# EAGLE board mightIO_tile (EAGLE 6.5.0)
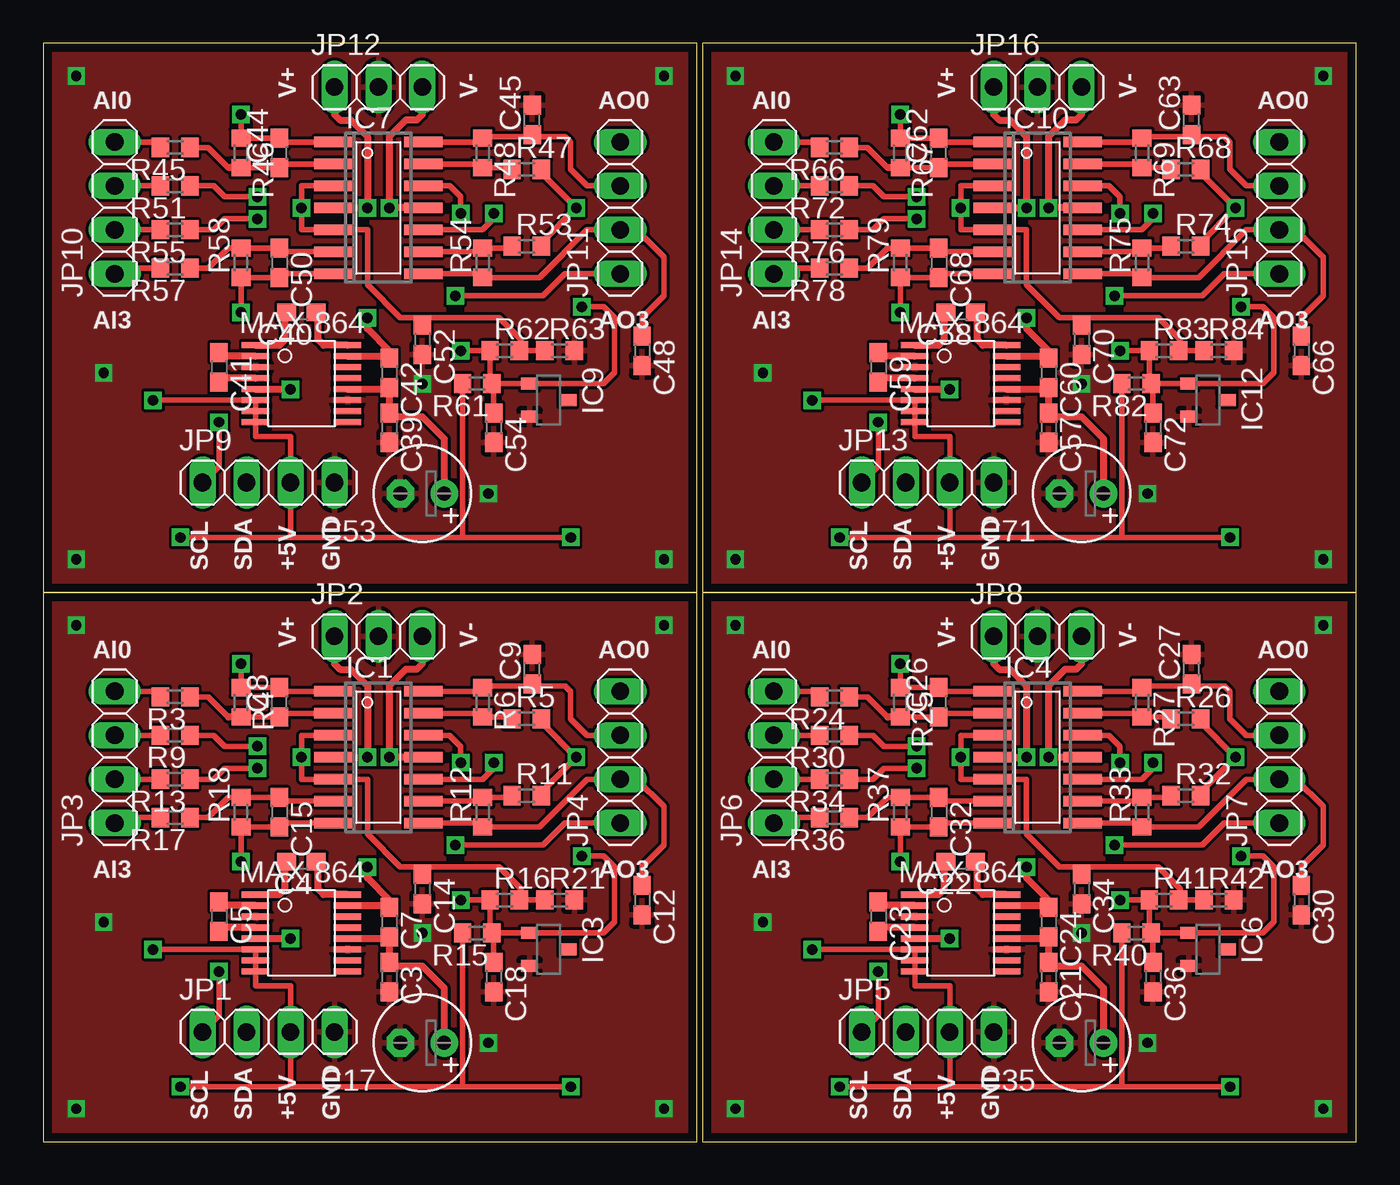
[diagram p0: board, top side]
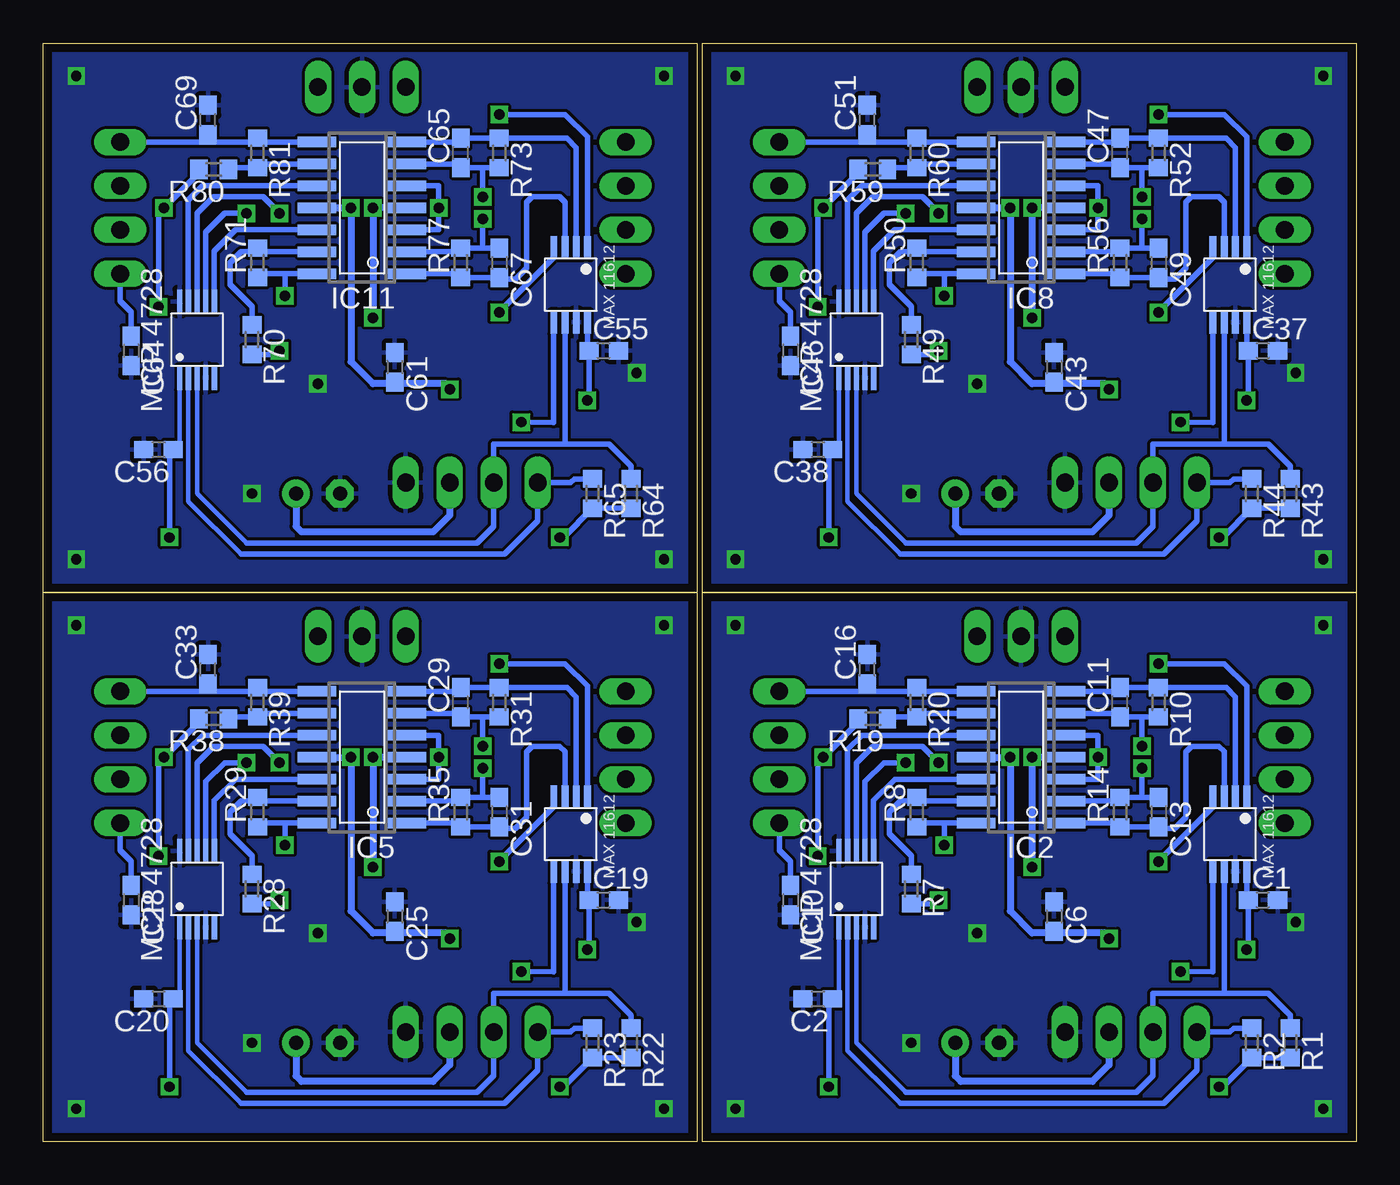
[diagram p1: board, bottom side, seen from below]

Size 75.88 x 63.49 mm. Coordinates in mm from the lower left corner, seen from the top.
Outline: 37.77,0 37.77,31.74 0,31.74 0,0 37.78,0
Outline: 75.87,0 75.87,31.74 38.1,31.74 38.1,0 75.88,0
Outline: 37.77,31.75 37.77,63.49 0,63.49 0,31.75 37.78,31.75
Outline: 75.87,31.75 75.87,63.49 38.1,63.49 38.1,31.75 75.88,31.75
Copper layers (1*16): Top 0.035mm / dielectric 1.5mm / Bottom 0.035mm
Design rules "default *": minimum track width 10mil, minimum drill 23mil, track to track 7mil, track to pad 7mil, pad to pad 7mil, via to via 8mil, smd to smd 0mil, copper to edge 20mil, drill to drill 8mil, minimum pad ring 10mil, minimum via ring 8mil, stop-mask expansion 4mil, vias tented up to drill 0mil, thermal gap 10mil
Net classes: 0 default: width 0.254 mm; 1 pwr: width 0.254 mm

## Footprints (pad centres in the part's own frame; a part is rotated, then mirrored left to right if it is on the bottom)
C0603 = smd 1.1 x 1: 1 -0.85,0; 2 0.85,0
E2,5-6 = drill 0.813 pad 1.6: + -1.27,0 | drill 0.813 pad 1.6 octagon: - 1.27,0
SO14 = smd 0.6 x 2.2: 1 -3.81,-2.6; 2 -2.54,-2.6; 3 -1.27,-2.6; 4 0,-2.6; 5 1.27,-2.6; 6 2.54,-2.6; 7 3.81,-2.6; 8 3.81,2.6; 9 2.54,2.6; 10 1.27,2.6; 11 0,2.6; 12 -1.27,2.6; 13 -2.54,2.6; 14 -3.81,2.6
DBZ_R-PDSO-G3 = smd 0.7 x 1: 1 -0.95,-1.1; 2 0.95,-1.1; 3 0,1.1
1X04 = drill 1.016 long: 1 -3.81,0; 2 -1.27,0; 3 1.27,0; 4 3.81,0
1X03 = drill 1.016 long: 1 -2.54,0; 2 0,0; 3 2.54,0
R0603 = smd 1 x 1.1: 1 -0.85,0; 2 0.85,0
MAX11612 = smd 1.35 x 0.4: P$1 -2.15,0.975; P$2 -2.15,0.325; P$3 -2.15,-0.325; P$4 -2.15,-0.975; P$5 2.15,-0.975; P$6 2.15,-0.325; P$7 2.15,0.325; P$8 2.15,0.975
MAX864 = smd 1.6 x 0.36: P$1 -2.655,2.223; P$2 -2.655,1.587; P$3 -2.655,0.953; P$4 -2.655,0.318; P$5 -2.655,-0.318; P$6 -2.655,-0.953; P$7 -2.655,-1.587; P$8 -2.655,-2.223; P$9 2.655,-2.223; P$10 2.655,-1.587; P$11 2.655,-0.953; P$12 2.655,-0.318; P$13 2.655,0.318; P$14 2.655,0.953; P$15 2.655,1.587; P$16 2.655,2.223
MCP4728 = smd 1.4 x 0.3: P$1 -2.2,1; P$2 -2.2,0.5; P$3 -2.2,0; P$4 -2.2,-0.5; P$5 -2.2,-1; P$6 2.2,-1; P$7 2.2,-0.5; P$8 2.2,0; P$9 2.2,0.5; P$10 2.2,1

## Placement (x,y rotation side)
C1  0.1uF  [C0603]  5.4,13.97 0 bottom
C2  0.1uF  [C0603]  31.11,8.26 180 bottom
C3  0.1uF  [C0603]  20,9.53 270 top
C4  2.2uF  [C0603]  14.92,16.19 180 top
C5  2.2uF  [C0603]  10.16,13.02 270 top
C6  2.2uF  [C0603]  17.46,13.02 270 bottom
C7  2.2uF  [C0603]  20,12.7 270 top
C8  220pF  [C0603]  13.65,25.4 90 top
C9  47pF  [C0603]  28.26,27.3 90 top
C10  47pF  [C0603]  32.7,13.97 270 bottom
C11  220pF  [C0603]  13.65,25.4 90 bottom
C12  47pF  [C0603]  34.61,13.97 270 top
C13  220pF  [C0603]  11.43,19.05 270 bottom
C14  0.1uF  [C0603]  21.91,14.61 270 top
C15  220pF  [C0603]  13.65,19.05 270 top
C16  47pF  [C0603]  28.26,27.3 90 bottom
C17  10uF  [E2,5-6]  21.91,5.71 180 top
C18  0.1uF  [C0603]  26.04,9.53 270 top
C19  0.1uF  [C0603]  43.5,13.97 0 bottom
C20  0.1uF  [C0603]  69.22,8.26 180 bottom
C21  0.1uF  [C0603]  58.1,9.53 270 top
C22  2.2uF  [C0603]  53.02,16.19 180 top
C23  2.2uF  [C0603]  48.26,13.02 270 top
C24  2.2uF  [C0603]  58.1,12.7 270 top
C25  2.2uF  [C0603]  55.56,13.02 270 bottom
C26  220pF  [C0603]  51.75,25.4 90 top
C27  47pF  [C0603]  66.36,27.3 90 top
C28  47pF  [C0603]  70.8,13.97 270 bottom
C29  220pF  [C0603]  51.75,25.4 90 bottom
C30  47pF  [C0603]  72.71,13.97 270 top
C31  220pF  [C0603]  49.53,19.05 270 bottom
C32  220pF  [C0603]  51.75,19.05 270 top
C33  47pF  [C0603]  66.36,27.3 90 bottom
C34  0.1uF  [C0603]  60.01,14.61 270 top
C35  10uF  [E2,5-6]  60.01,5.71 180 top
C36  0.1uF  [C0603]  64.14,9.53 270 top
C37  0.1uF  [C0603]  5.4,45.72 0 bottom
C38  0.1uF  [C0603]  31.11,40.01 180 bottom
C39  0.1uF  [C0603]  20,41.27 270 top
C40  2.2uF  [C0603]  14.92,47.94 180 top
C41  2.2uF  [C0603]  10.16,44.77 270 top
C42  2.2uF  [C0603]  20,44.45 270 top
C43  2.2uF  [C0603]  17.46,44.77 270 bottom
C44  220pF  [C0603]  13.65,57.15 90 top
C45  47pF  [C0603]  28.26,59.05 90 top
C46  47pF  [C0603]  32.7,45.72 270 bottom
C47  220pF  [C0603]  13.65,57.15 90 bottom
C48  47pF  [C0603]  34.61,45.72 270 top
C49  220pF  [C0603]  11.43,50.8 270 bottom
C50  220pF  [C0603]  13.65,50.8 270 top
C51  47pF  [C0603]  28.26,59.05 90 bottom
C52  0.1uF  [C0603]  21.91,46.35 270 top
C53  10uF  [E2,5-6]  21.91,37.47 180 top
C54  0.1uF  [C0603]  26.04,41.27 270 top
C55  0.1uF  [C0603]  43.5,45.72 0 bottom
C56  0.1uF  [C0603]  69.22,40.01 180 bottom
C57  0.1uF  [C0603]  58.1,41.27 270 top
C58  2.2uF  [C0603]  53.02,47.94 180 top
C59  2.2uF  [C0603]  48.26,44.77 270 top
C60  2.2uF  [C0603]  58.1,44.45 270 top
C61  2.2uF  [C0603]  55.56,44.77 270 bottom
C62  220pF  [C0603]  51.75,57.15 90 top
C63  47pF  [C0603]  66.36,59.05 90 top
C64  47pF  [C0603]  70.8,45.72 270 bottom
C65  220pF  [C0603]  51.75,57.15 90 bottom
C66  47pF  [C0603]  72.71,45.72 270 top
C67  220pF  [C0603]  49.53,50.8 270 bottom
C68  220pF  [C0603]  51.75,50.8 270 top
C69  47pF  [C0603]  66.36,59.05 90 bottom
C70  0.1uF  [C0603]  60.01,46.35 270 top
C71  10uF  [E2,5-6]  60.01,37.47 180 top
C72  0.1uF  [C0603]  64.14,41.27 270 top
IC1  TL064D  [SO14]  19.37,22.23 270 top
IC2  TL064D  [SO14]  19.37,22.23 90 bottom
IC3  LM4041A12DBZ  [DBZ_R-PDSO-G3]  29.21,11.11 270 top
IC4  TL064D  [SO14]  57.47,22.23 270 top
IC5  TL064D  [SO14]  57.47,22.23 90 bottom
IC6  LM4041A12DBZ  [DBZ_R-PDSO-G3]  67.31,11.11 270 top
IC7  TL064D  [SO14]  19.37,53.98 270 top
IC8  TL064D  [SO14]  19.37,53.98 90 bottom
IC9  LM4041A12DBZ  [DBZ_R-PDSO-G3]  29.21,42.86 270 top
IC10  TL064D  [SO14]  57.47,53.98 270 top
IC11  TL064D  [SO14]  57.47,53.98 90 bottom
IC12  LM4041A12DBZ  [DBZ_R-PDSO-G3]  67.31,42.86 270 top
JP1  [1X04]  13.02,6.35 0 top
JP2  [1X03]  19.37,29.21 0 top
JP3  [1X04]  4.13,22.23 90 top
JP4  [1X04]  33.34,22.23 90 top
JP5  [1X04]  51.12,6.35 0 top
JP6  [1X04]  42.23,22.23 90 top
JP7  [1X04]  71.44,22.23 90 top
JP8  [1X03]  57.47,29.21 0 top
JP9  [1X04]  13.02,38.1 0 top
JP10  [1X04]  4.13,53.98 90 top
JP11  [1X04]  33.34,53.98 90 top
JP12  [1X03]  19.37,60.96 0 top
JP13  [1X04]  51.12,38.1 0 top
JP14  [1X04]  42.23,53.98 90 top
JP15  [1X04]  71.44,53.98 90 top
JP16  [1X03]  57.47,60.96 0 top
R1  3.3k  [R0603]  3.81,5.71 270 bottom
R2  3.3k  [R0603]  6.03,5.71 270 bottom
R3  100k  [R0603]  7.62,25.72 180 top
R4  20k  [R0603]  11.43,25.4 270 top
R5  22k  [R0603]  27.94,24.45 0 top
R6  100k  [R0603]  25.4,25.4 270 top
R7  22k  [R0603]  25.72,14.61 270 bottom
R8  100k  [R0603]  25.4,19.05 90 bottom
R9  100k  [R0603]  7.62,23.5 180 top
R10  20k  [R0603]  11.43,25.4 270 bottom
R11  22k  [R0603]  27.94,20 0 top
R12  100k  [R0603]  25.4,19.05 90 top
R13  100k  [R0603]  7.62,20.95 180 top
R14  20k  [R0603]  13.65,19.05 90 bottom
R15  3.3k  [R0603]  25.08,12.06 180 top
R16  1k  [R0603]  26.67,13.97 0 top
R17  100k  [R0603]  7.62,18.73 180 top
R18  20k  [R0603]  11.43,19.05 90 top
R19  22k  [R0603]  27.94,24.45 180 bottom
R20  100k  [R0603]  25.4,25.4 270 bottom
R21  5.1k  [R0603]  29.84,13.97 0 top
R22  3.3k  [R0603]  41.91,5.71 270 bottom
R23  3.3k  [R0603]  44.13,5.71 270 bottom
R24  100k  [R0603]  45.72,25.72 180 top
R25  20k  [R0603]  49.53,25.4 270 top
R26  22k  [R0603]  66.04,24.45 0 top
R27  100k  [R0603]  63.5,25.4 270 top
R28  22k  [R0603]  63.82,14.61 270 bottom
R29  100k  [R0603]  63.5,19.05 90 bottom
R30  100k  [R0603]  45.72,23.5 180 top
R31  20k  [R0603]  49.53,25.4 270 bottom
R32  22k  [R0603]  66.04,20 0 top
R33  100k  [R0603]  63.5,19.05 90 top
R34  100k  [R0603]  45.72,20.95 180 top
R35  20k  [R0603]  51.75,19.05 90 bottom
R36  100k  [R0603]  45.72,18.73 180 top
R37  20k  [R0603]  49.53,19.05 90 top
R38  22k  [R0603]  66.04,24.45 180 bottom
R39  100k  [R0603]  63.5,25.4 270 bottom
R40  3.3k  [R0603]  63.18,12.06 180 top
R41  1k  [R0603]  64.77,13.97 0 top
R42  5.1k  [R0603]  67.94,13.97 0 top
R43  3.3k  [R0603]  3.81,37.47 270 bottom
R44  3.3k  [R0603]  6.03,37.47 270 bottom
R45  100k  [R0603]  7.62,57.47 180 top
R46  20k  [R0603]  11.43,57.15 270 top
R47  22k  [R0603]  27.94,56.2 0 top
R48  100k  [R0603]  25.4,57.15 270 top
R49  22k  [R0603]  25.72,46.35 270 bottom
R50  100k  [R0603]  25.4,50.8 90 bottom
R51  100k  [R0603]  7.62,55.24 180 top
R52  20k  [R0603]  11.43,57.15 270 bottom
R53  22k  [R0603]  27.94,51.75 0 top
R54  100k  [R0603]  25.4,50.8 90 top
R55  100k  [R0603]  7.62,52.7 180 top
R56  20k  [R0603]  13.65,50.8 90 bottom
R57  100k  [R0603]  7.62,50.48 180 top
R58  20k  [R0603]  11.43,50.8 90 top
R59  22k  [R0603]  27.94,56.2 180 bottom
R60  100k  [R0603]  25.4,57.15 270 bottom
R61  3.3k  [R0603]  25.08,43.81 180 top
R62  1k  [R0603]  26.67,45.72 0 top
R63  5.1k  [R0603]  29.84,45.72 0 top
R64  3.3k  [R0603]  41.91,37.47 270 bottom
R65  3.3k  [R0603]  44.13,37.47 270 bottom
R66  100k  [R0603]  45.72,57.47 180 top
R67  20k  [R0603]  49.53,57.15 270 top
R68  22k  [R0603]  66.04,56.2 0 top
R69  100k  [R0603]  63.5,57.15 270 top
R70  22k  [R0603]  63.82,46.35 270 bottom
R71  100k  [R0603]  63.5,50.8 90 bottom
R72  100k  [R0603]  45.72,55.24 180 top
R73  20k  [R0603]  49.53,57.15 270 bottom
R74  22k  [R0603]  66.04,51.75 0 top
R75  100k  [R0603]  63.5,50.8 90 top
R76  100k  [R0603]  45.72,52.7 180 top
R77  20k  [R0603]  51.75,50.8 90 bottom
R78  100k  [R0603]  45.72,50.48 180 top
R79  20k  [R0603]  49.53,50.8 90 top
R80  22k  [R0603]  66.04,56.2 180 bottom
R81  100k  [R0603]  63.5,57.15 270 bottom
R82  3.3k  [R0603]  63.18,43.81 180 top
R83  1k  [R0603]  64.77,45.72 0 top
R84  5.1k  [R0603]  67.94,45.72 0 top
U1  MAX11612  [MAX11612]  7.3,17.78 270 bottom
U2  MAX11612  [MAX11612]  45.4,17.78 270 bottom
U3  MAX11612  [MAX11612]  7.3,49.53 270 bottom
U4  MAX11612  [MAX11612]  45.4,49.53 270 bottom
U$1  MAX864  [MAX864]  14.92,12.06 0 top
U$2  MCP4728  [MCP4728]  28.89,14.61 90 bottom
U$3  MAX864  [MAX864]  53.02,12.06 0 top
U$4  MCP4728  [MCP4728]  66.99,14.61 90 bottom
U$5  MAX864  [MAX864]  14.92,43.81 0 top
U$6  MCP4728  [MCP4728]  28.89,46.35 90 bottom
U$7  MAX864  [MAX864]  53.02,43.81 0 top
U$8  MCP4728  [MCP4728]  66.99,46.35 90 bottom

## Library data of the parts
C1-C72 R1-R84 = rcl
IC1 IC2 IC4 IC5 IC7 IC8 IC10 IC11 = linear
IC3 IC6 IC9 IC12 = texas; MPN: LM4041A12IDBZR; OC_FARNELL: 1407949; OC_NEWARK: 58K5875
JP1-JP16 = pinhead
U1-U4 U$1-U$8 = Andrew

## Nets
+5V [pwr]: C1.1 C2.1 C3.1 C7.2 C17.+ JP1.3 R1.2 R2.2 R15.2 U1.P$8 U$1.P$6 U$1.P$7 U$1.P$8 U$1.P$12 U$2.P$1
+5V1 [pwr]: C19.1 C20.1 C21.1 C24.2 C35.+ JP5.3 R22.2 R23.2 R40.2 U2.P$8 U$3.P$6 U$3.P$7 U$3.P$8 U$3.P$12 U$4.P$1
+5V2 [pwr]: C37.1 C38.1 C39.1 C42.2 C53.+ JP9.3 R43.2 R44.2 R61.2 U3.P$8 U$5.P$6 U$5.P$7 U$5.P$8 U$5.P$12 U$6.P$1
+5V3 [pwr]: C55.1 C56.1 C57.1 C60.2 C71.+ JP13.3 R64.2 R65.2 R82.2 U4.P$8 U$7.P$6 U$7.P$7 U$7.P$8 U$7.P$12 U$8.P$1
AI0: JP3.4 R3.2
AI1: JP3.3 R9.2
AI2: JP3.2 R13.2
AI3: JP3.1 R17.2
AI4: JP6.3 R30.2
AI5: JP6.4 R24.2
AI6: JP6.1 R36.2
AI7: JP6.2 R34.2
AI8: JP10.3 R51.2
AI9: JP10.4 R45.2
AI10: JP10.1 R57.2
AI11: JP10.2 R55.2
AI12: JP14.3 R72.2
AI13: JP14.4 R66.2
AI14: JP14.1 R78.2
AI15: JP14.2 R76.2
AOA: C10.1 IC2.14 JP4.1 R8.1
AOA1: C28.1 IC5.14 JP7.1 R29.1
AOA2: C46.1 IC8.14 JP11.1 R50.1
AOA3: C64.1 IC11.14 JP15.1 R71.1
AOB: C12.1 IC1.8 JP4.2 R12.1
AOB1: C30.1 IC4.8 JP7.2 R33.1
AOB2: C48.1 IC7.8 JP11.2 R54.1
AOB3: C66.1 IC10.8 JP15.2 R75.1
AOC: C9.1 IC1.14 JP4.3 R6.1
AOC1: C27.1 IC4.14 JP7.3 R27.1
AOC2: C45.1 IC7.14 JP11.3 R48.1
AOC3: C63.1 IC10.14 JP15.3 R69.1
AOD: C16.1 IC2.8 JP4.4 R20.1
AOD1: C33.1 IC5.8 JP7.4 R39.1
AOD2: C51.1 IC8.8 JP11.4 R60.1
AOD3: C69.1 IC11.8 JP15.4 R81.1
GND [pwr]: C1.2 C2.2 C3.2 C6.1 C9.2 C10.2 C12.2 C14.2 C16.2 C17.- C18.2 IC3.2 JP1.4 JP2.2 R21.2 U1.P$7 U$1.P$3 U$1.P$11 U$2.P$4 U$2.P$10
GND1 [pwr]: C19.2 C20.2 C21.2 C25.1 C27.2 C28.2 C30.2 C33.2 C34.2 C35.- C36.2 IC6.2 JP5.4 JP8.2 R42.2 U2.P$7 U$3.P$3 U$3.P$11 U$4.P$4 U$4.P$10
GND2 [pwr]: C37.2 C38.2 C39.2 C43.1 C45.2 C46.2 C48.2 C51.2 C52.2 C53.- C54.2 IC9.2 JP9.4 JP12.2 R63.2 U3.P$7 U$5.P$3 U$5.P$11 U$6.P$4 U$6.P$10
GND3 [pwr]: C55.2 C56.2 C57.2 C61.1 C63.2 C64.2 C66.2 C69.2 C70.2 C71.- C72.2 IC12.2 JP13.4 JP16.2 R84.2 U4.P$7 U$7.P$3 U$7.P$11 U$8.P$4 U$8.P$10
N$1: IC2.10 U$2.P$9
N$2: IC2.9 R19.1 R20.2
N$3: IC1.10 U$2.P$7
N$4: IC1.13 R5.1 R6.2
N$5: IC1.9 R11.1 R12.2
N$6: IC2.13 R7.1 R8.2
N$7: C4.1 U$1.P$16
N$8: C4.2 U$1.P$1
N$9: C5.1 U$1.P$2
N$10: C5.2 U$1.P$4
N$11: C8.1 IC1.2 R3.1 R4.2
N$12: C13.2 IC2.1 R14.1 U1.P$3
N$13: IC5.10 U$4.P$9
N$14: C22.1 U$3.P$16
N$15: C22.2 U$3.P$1
N$16: C23.1 U$3.P$2
N$17: C23.2 U$3.P$4
N$18: C8.2 IC1.1 R4.1 U1.P$1
N$19: C11.1 IC2.6 R9.1 R10.2
N$20: C11.2 IC2.7 R10.1 U1.P$2
N$21: C26.1 IC4.2 R24.1 R25.2
N$22: C15.2 IC1.7 R18.1 U1.P$4
N$23: C13.1 IC2.2 R13.1 R14.2
N$24: C29.1 IC5.6 R30.1 R31.2
N$25: IC2.12 U$2.P$6
N$26: C31.1 IC5.2 R34.1 R35.2
N$27: C15.1 IC1.6 R17.1 R18.2
N$28: C32.1 IC4.6 R36.1 R37.2
N$29: IC4.12 U$4.P$8
N$30: C29.2 IC5.7 R31.1 U2.P$2
N$31: IC4.10 U$4.P$7
N$32: C26.2 IC4.1 R25.1 U2.P$1
N$33: C31.2 IC5.1 R35.1 U2.P$3
N$34: IC1.12 U$2.P$8
N$35: C32.2 IC4.7 R37.1 U2.P$4
N$36: IC5.12 U$4.P$6
N$37: IC5.9 R38.1 R39.2
N$38: IC4.13 R26.1 R27.2
N$39: IC4.9 R32.1 R33.2
N$40: IC5.13 R28.1 R29.2
N$41: IC8.10 U$6.P$9
N$42: C40.1 U$5.P$16
N$43: C40.2 U$5.P$1
N$44: C41.1 U$5.P$2
N$45: C41.2 U$5.P$4
N$46: C44.1 IC7.2 R45.1 R46.2
N$47: C47.1 IC8.6 R51.1 R52.2
N$48: C49.1 IC8.2 R55.1 R56.2
N$49: C50.1 IC7.6 R57.1 R58.2
N$50: IC7.12 U$6.P$8
N$51: C47.2 IC8.7 R52.1 U3.P$2
N$52: IC7.10 U$6.P$7
N$53: C44.2 IC7.1 R46.1 U3.P$1
N$54: C49.2 IC8.1 R56.1 U3.P$3
N$55: C50.2 IC7.7 R58.1 U3.P$4
N$56: IC8.12 U$6.P$6
N$57: IC8.9 R59.1 R60.2
N$58: IC7.13 R47.1 R48.2
N$59: IC7.9 R53.1 R54.2
N$60: IC8.13 R49.1 R50.2
N$61: IC11.10 U$8.P$9
N$62: C58.1 U$7.P$16
N$63: C58.2 U$7.P$1
N$64: C59.1 U$7.P$2
N$65: C59.2 U$7.P$4
N$66: C62.1 IC10.2 R66.1 R67.2
N$67: C65.1 IC11.6 R72.1 R73.2
N$68: C67.1 IC11.2 R76.1 R77.2
N$69: C68.1 IC10.6 R78.1 R79.2
N$70: IC10.12 U$8.P$8
N$71: C65.2 IC11.7 R73.1 U4.P$2
N$72: IC10.10 U$8.P$7
N$73: C62.2 IC10.1 R67.1 U4.P$1
N$74: C67.2 IC11.1 R77.1 U4.P$3
N$75: C68.2 IC10.7 R79.1 U4.P$4
N$76: IC11.12 U$8.P$6
N$77: IC11.9 R80.1 R81.2
N$78: IC10.13 R68.1 R69.2
N$79: IC10.9 R74.1 R75.2
N$80: IC11.13 R70.1 R71.2
SCL: JP1.1 R2.1 U1.P$5 U$2.P$2
SCL1: JP5.1 R23.1 U2.P$5 U$4.P$2
SCL2: JP9.1 R44.1 U3.P$5 U$6.P$2
SCL3: JP13.1 R65.1 U4.P$5 U$8.P$2
SDA: JP1.2 R1.1 U1.P$6 U$2.P$3
SDA1: JP5.2 R22.1 U2.P$6 U$4.P$3
SDA2: JP9.2 R43.1 U3.P$6 U$6.P$3
SDA3: JP13.2 R64.1 U4.P$6 U$8.P$3
V+: C7.1 IC1.4 IC2.4 JP2.1 U$1.P$15
V+1: C24.1 IC4.4 IC5.4 JP8.1 U$3.P$15
V+2: C42.1 IC7.4 IC8.4 JP12.1 U$5.P$15
V+3: C60.1 IC10.4 IC11.4 JP16.1 U$7.P$15
V-: C6.2 IC1.11 IC2.11 JP2.3 U$1.P$5
V-1: C25.2 IC4.11 IC5.11 JP8.3 U$3.P$5
V-2: C43.2 IC7.11 IC8.11 JP12.3 U$5.P$5
V-3: C61.2 IC10.11 IC11.11 JP16.3 U$7.P$5
VREFIN: C14.1 IC1.3 IC1.5 IC2.3 IC2.5 R16.2 R21.1
VREFIN1: C34.1 IC4.3 IC4.5 IC5.3 IC5.5 R41.2 R42.1
VREFIN2: C52.1 IC7.3 IC7.5 IC8.3 IC8.5 R62.2 R63.1
VREFIN3: C70.1 IC10.3 IC10.5 IC11.3 IC11.5 R83.2 R84.1
VREFOUT: C18.1 IC3.1 R5.2 R7.2 R11.2 R15.1 R16.1 R19.2
VREFOUT1: C36.1 IC6.1 R26.2 R28.2 R32.2 R38.2 R40.1 R41.1
VREFOUT2: C54.1 IC9.1 R47.2 R49.2 R53.2 R59.2 R61.1 R62.1
VREFOUT3: C72.1 IC12.1 R68.2 R70.2 R74.2 R80.2 R82.1 R83.1

## Tracks (layer width: path | path; a pad name or v marks a point on that pad's centre or on a via)
+5V  (via drill 0.6)
  Top 0.305: 19.9,11.75 C7.2 | v6.35,11.11 U$1.P$6 U$1.P$7 U$1.P$8 12.27,9.01 14.29,9.01 JP1.3 14.29,3.17 | v7.94,3.17 14.29,3.17 | R15.2 24.23,3.17 | 24.23,3.17 14.29,3.17 | 24.23,3.17 v30.48,3.17 | 20,10.48 C3.1
  Top 0.406: U$1.P$12 19.9,11.75 | 19.9,10.48 C3.1 | C7.2 20,10.48 20.32,10.16 21.91,10.16 23.18,8.89 C17.+
  Bottom 0.254: 29.89,8.04 29.89,8.26 U$2.P$1
  Bottom 0.305: U1.P$8 6.33,14.05 C1.1 6.25,11.21 v6.35,11.11 | R1.2 R2.2 7.72,3.17 v7.94,3.17 | v30.48,3.17 30.48,8.04 C2.1 29.89,8.26
  Bottom 0.406: JP1.3 14.29,4.45 15.24,3.49 22.86,3.49 23.18,3.81 C17.+
+5V1  (via drill 0.6)
  Top 0.305: 58,11.75 C24.2 | v44.45,11.11 U$3.P$6 U$3.P$7 U$3.P$8 50.37,9.01 52.39,9.01 JP5.3 52.39,3.17 | v46.04,3.17 52.39,3.17 | R40.2 62.33,3.17 | 62.33,3.17 52.39,3.17 | 62.33,3.17 v68.58,3.17 | 58.1,10.48 C21.1
  Top 0.406: U$3.P$12 58,11.75 | 58,10.48 C21.1 | C24.2 58.1,10.48 58.42,10.16 60.01,10.16 61.28,8.89 C35.+
  Bottom 0.254: 67.99,8.04 67.99,8.26 U$4.P$1
  Bottom 0.305: U2.P$8 44.43,14.05 C19.1 44.35,11.21 v44.45,11.11 | R22.2 R23.2 45.82,3.17 v46.04,3.17 | v68.58,3.17 68.58,8.04 C20.1 67.99,8.26
  Bottom 0.406: JP5.3 52.39,4.45 53.34,3.49 60.96,3.49 61.28,3.81 C35.+
+5V2  (via drill 0.6)
  Top 0.305: 19.9,43.5 C42.2 | v6.35,42.86 U$5.P$6 U$5.P$7 U$5.P$8 12.27,40.76 14.29,40.76 JP9.3 14.29,34.92 | v7.94,34.92 14.29,34.92 | R61.2 24.23,34.92 | 24.23,34.92 14.29,34.92 | 24.23,34.92 v30.48,34.92 | 20,42.23 C39.1
  Top 0.406: U$5.P$12 19.9,43.5 | 19.9,42.23 C39.1 | C42.2 20,42.23 20.32,41.91 21.91,41.91 23.18,40.64 C53.+
  Bottom 0.254: 29.89,39.79 29.89,40.01 U$6.P$1
  Bottom 0.305: U3.P$8 6.33,45.8 C37.1 6.25,42.97 v6.35,42.86 | R43.2 R44.2 7.72,34.92 v7.94,34.92 | v30.48,34.92 30.48,39.79 C38.1 29.89,40.01
  Bottom 0.406: JP9.3 14.29,36.2 15.24,35.24 22.86,35.24 23.18,35.56 C53.+
+5V3  (via drill 0.6)
  Top 0.305: 58,43.5 C60.2 | v44.45,42.86 U$7.P$6 U$7.P$7 U$7.P$8 50.37,40.76 52.39,40.76 JP13.3 52.39,34.92 | v46.04,34.92 52.39,34.92 | R82.2 62.33,34.92 | 62.33,34.92 52.39,34.92 | 62.33,34.92 v68.58,34.92 | 58.1,42.23 C57.1
  Top 0.406: U$7.P$12 58,43.5 | 58,42.23 C57.1 | C60.2 58.1,42.23 58.42,41.91 60.01,41.91 61.28,40.64 C71.+
  Bottom 0.254: 67.99,39.79 67.99,40.01 U$8.P$1
  Bottom 0.305: U4.P$8 44.43,45.8 C55.1 44.35,42.97 v44.45,42.86 | R64.2 R65.2 45.82,34.92 v46.04,34.92 | v68.58,34.92 68.58,39.79 C56.1 67.99,40.01
  Bottom 0.406: JP13.3 52.39,36.2 53.34,35.24 60.96,35.24 61.28,35.56 C71.+
AI0
  Top 0.305: JP3.4 6.35,26.04
  Top 0.406: 6.35,26.04 R3.2
AI1
  Top 0.305: JP3.3 R9.2
AI2
  Top 0.305: JP3.2 R13.2
AI3
  Top 0.305: JP3.1 3.81,18.73 R17.2
AI4
  Top 0.305: JP6.3 R30.2
AI5
  Top 0.305: JP6.4 44.45,26.04
  Top 0.406: 44.45,26.04 R24.2
AI6
  Top 0.305: JP6.1 41.91,18.73 R36.2
AI7
  Top 0.305: JP6.2 R34.2
AI8
  Top 0.305: JP10.3 R51.2
AI9
  Top 0.305: JP10.4 6.35,57.78
  Top 0.406: 6.35,57.78 R45.2
AI10
  Top 0.305: JP10.1 3.81,50.48 R57.2
AI11
  Top 0.305: JP10.2 R55.2
AI12
  Top 0.305: JP14.3 R72.2
AI13
  Top 0.305: JP14.4 44.45,57.78
  Top 0.406: 44.45,57.78 R66.2
AI14
  Top 0.305: JP14.1 41.91,50.48 R78.2
AI15
  Top 0.305: JP14.2 R76.2
AOA  (via drill 0.6)
  Top 0.305: JP4.1 30.16,18.41 28.89,17.14 v23.81,17.14
  Bottom 0.305: IC2.14 23.81,18.41 | v23.81,17.14 23.81,18.41 | 23.81,18.41 25.4,18.41 R8.1 | C10.1 32.7,16.19 33.34,16.83 JP4.1
AOA1  (via drill 0.6)
  Top 0.305: JP7.1 68.26,18.41 66.99,17.14 v61.91,17.14
  Bottom 0.305: IC5.14 61.91,18.41 | v61.91,17.14 61.91,18.41 | 61.91,18.41 63.5,18.41 R29.1 | C28.1 70.8,16.19 71.44,16.83 JP7.1
AOA2  (via drill 0.6)
  Top 0.305: JP11.1 30.16,50.16 28.89,48.9 v23.81,48.9
  Bottom 0.305: IC8.14 23.81,50.16 | v23.81,48.9 23.81,50.16 | 23.81,50.16 25.4,50.16 R50.1 | C46.1 32.7,47.94 33.34,48.58 JP11.1
AOA3  (via drill 0.6)
  Top 0.305: JP15.1 68.26,50.16 66.99,48.9 v61.91,48.9
  Bottom 0.305: IC11.14 61.91,50.16 | v61.91,48.9 61.91,50.16 | 61.91,50.16 63.5,50.16 R71.1 | C64.1 70.8,47.94 71.44,48.58 JP15.1
AOB
  Top 0.305: IC1.8 25.4,18.41 R12.1 28.68,18.2 31.43,20.95 JP4.2 34.29,20.95 35.88,19.37 35.88,17.14 34.61,15.88 C12.1
AOB1
  Top 0.305: IC4.8 63.5,18.41 R33.1 66.78,18.2 69.53,20.95 JP7.2 72.39,20.95 73.98,19.37 73.98,17.14 72.71,15.88 C30.1
AOB2
  Top 0.305: IC7.8 25.4,50.16 R54.1 28.68,49.95 31.43,52.7 JP11.2 34.29,52.7 35.88,51.12 35.88,48.9 34.61,47.62 C48.1
AOB3
  Top 0.305: IC10.8 63.5,50.16 R75.1 66.78,49.95 69.53,52.7 JP15.2 72.39,52.7 73.98,51.12 73.98,48.9 72.71,47.62 C66.1
AOC
  Top 0.305: IC1.14 25.4,26.04 R6.1 25.5,26.35 28.57,26.35 | JP4.3 31.43,23.5 30.48,24.45 30.48,26.04 30.16,26.35 28.57,26.35 | C9.1 28.57,26.45 28.57,26.35
AOC1
  Top 0.305: IC4.14 63.5,26.04 R27.1 63.6,26.35 66.67,26.35 | JP7.3 69.53,23.5 68.58,24.45 68.58,26.04 68.26,26.35 66.67,26.35 | C27.1 66.67,26.45 66.67,26.35
AOC2
  Top 0.305: IC7.14 25.4,57.78 R48.1 25.5,58.1 28.57,58.1 | JP11.3 31.43,55.24 30.48,56.2 30.48,57.78 30.16,58.1 28.57,58.1 | C45.1 28.57,58.2 28.57,58.1
AOC3
  Top 0.305: IC10.14 63.5,57.78 R69.1 63.6,58.1 66.67,58.1 | JP15.3 69.53,55.24 68.58,56.2 68.58,57.78 68.26,58.1 66.67,58.1 | C63.1 66.67,58.2 66.67,58.1
AOD
  Bottom 0.305: IC2.8 25.4,26.04 | JP4.4 27.94,26.04 | 27.94,26.04 25.4,26.04 | 25.4,26.04 R20.1 | C16.1 27.94,26.45 27.94,26.04
AOD1
  Bottom 0.305: IC5.8 63.5,26.04 | JP7.4 66.04,26.04 | 66.04,26.04 63.5,26.04 | 63.5,26.04 R39.1 | C33.1 66.04,26.45 66.04,26.04
AOD2
  Bottom 0.305: IC8.8 25.4,57.78 | JP11.4 27.94,57.78 | 27.94,57.78 25.4,57.78 | 25.4,57.78 R60.1 | C51.1 27.94,58.2 27.94,57.78
AOD3
  Bottom 0.305: IC11.8 63.5,57.78 | JP15.4 66.04,57.78 | 66.04,57.78 63.5,57.78 | 63.5,57.78 R81.1 | C69.1 66.04,58.2 66.04,57.78
GND  (via drill 0.6)
  other vias: 21.91,12.06 1.91,29.84 35.88,29.84 35.88,1.91 1.91,1.91 3.49,12.7 25.72,5.71
  pour Top: 0,31.75 37.78,31.75 37.78,0 0,0
  pour Bottom: 0,31.75 37.78,31.75 37.78,0 0,0
GND1  (via drill 0.6)
  other vias: 60.01,12.06 40.01,29.84 73.98,29.84 73.98,1.91 40.01,1.91 41.59,12.7 63.82,5.71
  pour Top: 38.1,31.75 75.88,31.75 75.88,0 38.1,0
  pour Bottom: 38.1,31.75 75.88,31.75 75.88,0 38.1,0
GND2  (via drill 0.6)
  other vias: 21.91,43.81 1.91,61.59 35.88,61.59 35.88,33.66 1.91,33.66 3.49,44.45 25.72,37.47
  pour Top: 0,63.5 37.78,63.5 37.78,31.75 0,31.75
  pour Bottom: 0,63.5 37.78,63.5 37.78,31.75 0,31.75
GND3  (via drill 0.6)
  other vias: 60.01,43.81 40.01,61.59 73.98,61.59 73.98,33.66 40.01,33.66 41.59,44.45 63.82,37.47
  pour Top: 38.1,63.5 75.88,63.5 75.88,31.75 38.1,31.75
  pour Bottom: 38.1,63.5 75.88,63.5 75.88,31.75 38.1,31.75
N$1
  Bottom 0.305: U$2.P$9 29.39,22.68 28.57,23.5 IC2.10
N$2
  Bottom 0.305: IC2.9 25.4,24.77 R20.2 27.3,24.55 R19.1
N$3  (via drill 0.6)
  Top 0.305: IC1.10 25.4,20.95 26.04,21.59 v26.04,21.91
  Bottom 0.305: U$2.P$7 28.39,20.82 27.3,21.91 v26.04,21.91
N$4
  Top 0.305: IC1.13 25.4,24.77 R6.2 27.3,24.55 R5.1
N$5
  Top 0.305: IC1.9 25.4,19.68 R12.2 26.99,19.9 R11.1
N$6
  Bottom 0.305: IC2.13 25.4,19.68 | 25.4,19.68 R8.2 | 25.4,19.68 26.35,19.68 26.99,19.05 26.99,17.78 25.72,16.51 R7.1
N$7
  Top 0.305: 15.88,16.09 C4.1
  Top 0.406: U$1.P$16 16.19,14.29 15.88,14.61 15.88,16.09
N$8
  Top 0.305: 13.97,16.09 C4.2
  Top 0.406: U$1.P$1 13.65,14.29 13.97,14.61 13.97,16.09
N$9
  Top 0.305: 10.38,13.65 C5.1
  Top 0.406: U$1.P$2 10.38,13.65
N$10
  Top 0.305: 10.38,12.38 C5.2
  Top 0.406: U$1.P$4 10.38,12.38
N$11
  Top 0.305: R4.2 C8.1 | IC1.2 13.87,24.77 | 10.69,24.55 9.53,25.72 R3.1
  Top 0.406: 13.87,24.77 C8.1 | R4.2 10.69,24.55
N$12
  Bottom 0.305: IC2.1 13.87,18.41 | R14.1 C13.2 | U1.P$3 7.63,22.55 7.94,22.86 9.53,22.86 9.84,22.54 9.84,18.73 10.48,18.1 11.33,18.1
  Bottom 0.406: 13.87,18.41 R14.1 | 11.33,18.1 C13.2
N$13
  Bottom 0.305: U$4.P$9 67.49,22.68 66.67,23.5 IC5.10
N$14
  Top 0.305: 53.98,16.09 C22.1
  Top 0.406: U$3.P$16 54.29,14.29 53.98,14.61 53.98,16.09
N$15
  Top 0.305: 52.07,16.09 C22.2
  Top 0.406: U$3.P$1 51.75,14.29 52.07,14.61 52.07,16.09
N$16
  Top 0.305: 48.48,13.65 C23.1
  Top 0.406: U$3.P$2 48.48,13.65
N$17
  Top 0.305: 48.48,12.38 C23.2
  Top 0.406: U$3.P$4 48.48,12.38
N$18  (via drill 0.6)
  Top 0.305: C8.2 R4.1 v11.43,27.62 | IC1.1 13.87,26.04
  Top 0.406: R4.1 11.53,26.25 11.75,26.04 | 13.87,26.04 C8.2
  Bottom 0.305: v11.43,27.62 7.62,27.62 6.33,26.33 U1.P$1
N$19  (via drill 0.6)
  Top 0.305: R9.1 9.84,23.5 10.48,22.86 v12.38,22.86
  Bottom 0.305: IC2.6 13.87,24.77 | R10.2 12.38,24.55 | 12.38,24.55 C11.1 | v12.38,22.86 12.38,24.55
  Bottom 0.406: 13.87,24.77 C11.1
N$20
  Bottom 0.305: 13.87,26.04 IC2.7 | C11.2 R10.1 7.52,26.25 6.98,25.71 U1.P$2
  Bottom 0.406: C11.2 13.87,26.04
N$21
  Top 0.305: R25.2 C26.1 | IC4.2 51.97,24.77 | 48.79,24.55 47.62,25.72 R24.1
  Top 0.406: 51.97,24.77 C26.1 | R25.2 48.79,24.55
N$22  (via drill 0.6)
  Top 0.305: IC1.7 13.87,18.41 | C15.2 R18.1 v11.43,16.19
  Top 0.406: 13.87,18.41 C15.2
  Bottom 0.305: U1.P$4 8.28,19.34 v11.43,16.19
N$23  (via drill 0.6)
  Top 0.305: R13.1 9.84,20.95 10.48,21.59 v12.38,21.59
  Bottom 0.305: IC2.2 13.87,19.68 | R14.2 12.38,19.9 | 12.38,19.9 C13.1 | v12.38,21.59 12.38,19.9
  Bottom 0.406: 13.87,19.68 R14.2
N$24  (via drill 0.6)
  Top 0.305: R30.1 47.94,23.5 48.58,22.86 v50.48,22.86
  Bottom 0.305: IC5.6 51.97,24.77 | R31.2 50.48,24.55 | 50.48,24.55 C29.1 | v50.48,22.86 50.48,24.55
  Bottom 0.406: 51.97,24.77 C29.1
N$25
  Bottom 0.305: U$2.P$6 27.89,19.73 26.67,20.95 IC2.12
N$26  (via drill 0.6)
  Top 0.305: R34.1 47.94,20.95 48.58,21.59 v50.48,21.59
  Bottom 0.305: IC5.2 51.97,19.68 | R35.2 50.48,19.9 | 50.48,19.9 C31.1 | v50.48,21.59 50.48,19.9
  Bottom 0.406: 51.97,19.68 R35.2
N$27
  Top 0.305: C15.1 R18.2 10.69,19.9 9.53,18.73 R17.1 | 13.87,19.68 IC1.6
  Top 0.406: 13.87,19.68 C15.1
N$28
  Top 0.305: C32.1 R37.2 48.79,19.9 47.62,18.73 R36.1 | 51.97,19.68 IC4.6
  Top 0.406: 51.97,19.68 C32.1
N$29  (via drill 0.6)
  Top 0.305: v62.23,21.91 62.23,22.86 61.59,23.5 IC4.12
  Bottom 0.305: U$4.P$8 66.99,21.91 66.04,22.86 63.18,22.86 v62.23,21.91
N$30
  Bottom 0.305: 51.97,26.04 IC5.7 | C29.2 R31.1 45.62,26.25 45.08,25.71 U2.P$2
  Bottom 0.406: C29.2 51.97,26.04
N$31  (via drill 0.6)
  Top 0.305: IC4.10 63.5,20.95 64.14,21.59 v64.14,21.91
  Bottom 0.305: U$4.P$7 66.49,20.82 65.41,21.91 v64.14,21.91
N$32  (via drill 0.6)
  Top 0.305: C26.2 R25.1 v49.53,27.62 | IC4.1 51.97,26.04
  Top 0.406: R25.1 49.63,26.25 49.85,26.04 | 51.97,26.04 C26.2
  Bottom 0.305: v49.53,27.62 45.72,27.62 44.43,26.33 U2.P$1
N$33
  Bottom 0.305: IC5.1 51.97,18.41 | R35.1 C31.2 | U2.P$3 45.73,22.55 46.04,22.86 47.62,22.86 47.94,22.54 47.94,18.73 48.58,18.1 49.43,18.1
  Bottom 0.406: 51.97,18.41 R35.1 | 49.43,18.1 C31.2
N$34  (via drill 0.6)
  Top 0.305: v24.13,21.91 24.13,22.86 23.5,23.5 IC1.12
  Bottom 0.305: U$2.P$8 28.89,21.91 27.94,22.86 25.08,22.86 v24.13,21.91
N$35  (via drill 0.6)
  Top 0.305: IC4.7 51.97,18.41 | C32.2 R37.1 v49.53,16.19
  Top 0.406: 51.97,18.41 C32.2
  Bottom 0.305: U2.P$4 46.38,19.34 v49.53,16.19
N$36
  Bottom 0.305: U$4.P$6 65.99,19.73 64.77,20.95 IC5.12
N$37
  Bottom 0.305: IC5.9 63.5,24.77 R39.2 65.41,24.55 R38.1
N$38
  Top 0.305: IC4.13 63.5,24.77 R27.2 65.41,24.55 R26.1
N$39
  Top 0.305: IC4.9 63.5,19.68 R33.2 65.09,19.9 R32.1
N$40
  Bottom 0.305: IC5.13 63.5,19.68 | 63.5,19.68 R29.2 | 63.5,19.68 64.45,19.68 65.09,19.05 65.09,17.78 63.82,16.51 R28.1
N$41
  Bottom 0.305: U$6.P$9 29.39,54.43 28.57,55.24 IC8.10
N$42
  Top 0.305: 15.88,47.84 C40.1
  Top 0.406: U$5.P$16 16.19,46.04 15.88,46.35 15.88,47.84
N$43
  Top 0.305: 13.97,47.84 C40.2
  Top 0.406: U$5.P$1 13.65,46.04 13.97,46.35 13.97,47.84
N$44
  Top 0.305: 10.38,45.4 C41.1
  Top 0.406: U$5.P$2 10.38,45.4
N$45
  Top 0.305: 10.38,44.13 C41.2
  Top 0.406: U$5.P$4 10.38,44.13
N$46
  Top 0.305: R46.2 C44.1 | IC7.2 13.87,56.52 | 10.69,56.3 9.53,57.47 R45.1
  Top 0.406: 13.87,56.52 C44.1 | R46.2 10.69,56.3
N$47  (via drill 0.6)
  Top 0.305: R51.1 9.84,55.24 10.48,54.61 v12.38,54.61
  Bottom 0.305: IC8.6 13.87,56.52 | R52.2 12.38,56.3 | 12.38,56.3 C47.1 | v12.38,54.61 12.38,56.3
  Bottom 0.406: 13.87,56.52 C47.1
N$48  (via drill 0.6)
  Top 0.305: R55.1 9.84,52.7 10.48,53.34 v12.38,53.34
  Bottom 0.305: IC8.2 13.87,51.44 | R56.2 12.38,51.65 | 12.38,51.65 C49.1 | v12.38,53.34 12.38,51.65
  Bottom 0.406: 13.87,51.44 R56.2
N$49
  Top 0.305: C50.1 R58.2 10.69,51.65 9.53,50.48 R57.1 | 13.87,51.44 IC7.6
  Top 0.406: 13.87,51.44 C50.1
N$50  (via drill 0.6)
  Top 0.305: v24.13,53.66 24.13,54.61 23.5,55.24 IC7.12
  Bottom 0.305: U$6.P$8 28.89,53.66 27.94,54.61 25.08,54.61 v24.13,53.66
N$51
  Bottom 0.305: 13.87,57.78 IC8.7 | C47.2 R52.1 7.52,58 6.98,57.46 U3.P$2
  Bottom 0.406: C47.2 13.87,57.78
N$52  (via drill 0.6)
  Top 0.305: IC7.10 25.4,52.7 26.04,53.34 v26.04,53.66
  Bottom 0.305: U$6.P$7 28.39,52.57 27.3,53.66 v26.04,53.66
N$53  (via drill 0.6)
  Top 0.305: C44.2 R46.1 v11.43,59.37 | IC7.1 13.87,57.78
  Top 0.406: R46.1 11.53,58 11.75,57.78 | 13.87,57.78 C44.2
  Bottom 0.305: v11.43,59.37 7.62,59.37 6.33,58.08 U3.P$1
N$54
  Bottom 0.305: IC8.1 13.87,50.16 | R56.1 C49.2 | U3.P$3 7.63,54.3 7.94,54.61 9.53,54.61 9.84,54.29 9.84,50.48 10.48,49.85 11.33,49.85
  Bottom 0.406: 13.87,50.16 R56.1 | 11.33,49.85 C49.2
N$55  (via drill 0.6)
  Top 0.305: IC7.7 13.87,50.16 | C50.2 R58.1 v11.43,47.94
  Top 0.406: 13.87,50.16 C50.2
  Bottom 0.305: U3.P$4 8.28,51.09 v11.43,47.94
N$56
  Bottom 0.305: U$6.P$6 27.89,51.48 26.67,52.7 IC8.12
N$57
  Bottom 0.305: IC8.9 25.4,56.52 R60.2 27.3,56.3 R59.1
N$58
  Top 0.305: IC7.13 25.4,56.52 R48.2 27.3,56.3 R47.1
N$59
  Top 0.305: IC7.9 25.4,51.44 R54.2 26.99,51.65 R53.1
N$60
  Bottom 0.305: IC8.13 25.4,51.44 | 25.4,51.44 R50.2 | 25.4,51.44 26.35,51.44 26.99,50.8 26.99,49.53 25.72,48.26 R49.1
N$61
  Bottom 0.305: U$8.P$9 67.49,54.43 66.67,55.24 IC11.10
N$62
  Top 0.305: 53.98,47.84 C58.1
  Top 0.406: U$7.P$16 54.29,46.04 53.98,46.35 53.98,47.84
N$63
  Top 0.305: 52.07,47.84 C58.2
  Top 0.406: U$7.P$1 51.75,46.04 52.07,46.35 52.07,47.84
N$64
  Top 0.305: 48.48,45.4 C59.1
  Top 0.406: U$7.P$2 48.48,45.4
N$65
  Top 0.305: 48.48,44.13 C59.2
  Top 0.406: U$7.P$4 48.48,44.13
N$66
  Top 0.305: R67.2 C62.1 | IC10.2 51.97,56.52 | 48.79,56.3 47.62,57.47 R66.1
  Top 0.406: 51.97,56.52 C62.1 | R67.2 48.79,56.3
N$67  (via drill 0.6)
  Top 0.305: R72.1 47.94,55.24 48.58,54.61 v50.48,54.61
  Bottom 0.305: IC11.6 51.97,56.52 | R73.2 50.48,56.3 | 50.48,56.3 C65.1 | v50.48,54.61 50.48,56.3
  Bottom 0.406: 51.97,56.52 C65.1
N$68  (via drill 0.6)
  Top 0.305: R76.1 47.94,52.7 48.58,53.34 v50.48,53.34
  Bottom 0.305: IC11.2 51.97,51.44 | R77.2 50.48,51.65 | 50.48,51.65 C67.1 | v50.48,53.34 50.48,51.65
  Bottom 0.406: 51.97,51.44 R77.2
N$69
  Top 0.305: C68.1 R79.2 48.79,51.65 47.62,50.48 R78.1 | 51.97,51.44 IC10.6
  Top 0.406: 51.97,51.44 C68.1
N$70  (via drill 0.6)
  Top 0.305: v62.23,53.66 62.23,54.61 61.59,55.24 IC10.12
  Bottom 0.305: U$8.P$8 66.99,53.66 66.04,54.61 63.18,54.61 v62.23,53.66
N$71
  Bottom 0.305: 51.97,57.78 IC11.7 | C65.2 R73.1 45.62,58 45.08,57.46 U4.P$2
  Bottom 0.406: C65.2 51.97,57.78
N$72  (via drill 0.6)
  Top 0.305: IC10.10 63.5,52.7 64.14,53.34 v64.14,53.66
  Bottom 0.305: U$8.P$7 66.49,52.57 65.41,53.66 v64.14,53.66
N$73  (via drill 0.6)
  Top 0.305: C62.2 R67.1 v49.53,59.37 | IC10.1 51.97,57.78
  Top 0.406: R67.1 49.63,58 49.85,57.78 | 51.97,57.78 C62.2
  Bottom 0.305: v49.53,59.37 45.72,59.37 44.43,58.08 U4.P$1
N$74
  Bottom 0.305: IC11.1 51.97,50.16 | R77.1 C67.2 | U4.P$3 45.73,54.3 46.04,54.61 47.62,54.61 47.94,54.29 47.94,50.48 48.58,49.85 49.43,49.85
  Bottom 0.406: 51.97,50.16 R77.1 | 49.43,49.85 C67.2
N$75  (via drill 0.6)
  Top 0.305: IC10.7 51.97,50.16 | C68.2 R79.1 v49.53,47.94
  Top 0.406: 51.97,50.16 C68.2
  Bottom 0.305: U4.P$4 46.38,51.09 v49.53,47.94
N$76
  Bottom 0.305: U$8.P$6 65.99,51.48 64.77,52.7 IC11.12
N$77
  Bottom 0.305: IC11.9 63.5,56.52 R81.2 65.41,56.3 R80.1
N$78
  Top 0.305: IC10.13 63.5,56.52 R69.2 65.41,56.3 R68.1
N$79
  Top 0.305: IC10.9 63.5,51.44 R75.2 65.09,51.65 R74.1
N$80
  Bottom 0.305: IC11.13 63.5,51.44 | 63.5,51.44 R71.2 | 63.5,51.44 64.45,51.44 65.09,50.8 65.09,49.53 63.82,48.26 R70.1
SCL  (via drill 0.6)
  Top 0.305: JP1.1 10.16,7.3 v10.16,9.84
  Bottom 0.254: 26.35,2.22 29.39,5.26 U$2.P$2
  Bottom 0.305: R2.1 7.09,6.57 7.3,6.35 JP1.1 9.21,4.13 11.11,2.22 26.35,2.22 | U1.P$5 8.28,9.82 v10.16,9.84
SCL1  (via drill 0.6)
  Top 0.305: JP5.1 48.26,7.3 v48.26,9.84
  Bottom 0.254: 64.45,2.22 67.49,5.26 U$4.P$2
  Bottom 0.305: R23.1 45.19,6.57 45.4,6.35 JP5.1 47.31,4.13 49.21,2.22 64.45,2.22 | U2.P$5 46.38,9.82 v48.26,9.84
SCL2  (via drill 0.6)
  Top 0.305: JP9.1 10.16,39.05 v10.16,41.59
  Bottom 0.254: 26.35,33.97 29.39,37.01 U$6.P$2
  Bottom 0.305: R44.1 7.09,38.31 7.3,38.1 JP9.1 9.21,35.88 11.11,33.97 26.35,33.97 | U3.P$5 8.28,41.57 v10.16,41.59
SCL3  (via drill 0.6)
  Top 0.305: JP13.1 48.26,39.05 v48.26,41.59
  Bottom 0.254: 64.45,33.97 67.49,37.01 U$8.P$2
  Bottom 0.305: R65.1 45.19,38.31 45.4,38.1 JP13.1 47.31,35.88 49.21,33.97 64.45,33.97 | U4.P$5 46.38,41.57 v48.26,41.59
SDA
  Bottom 0.254: U$2.P$3 28.89,5.71 26.04,2.86
  Bottom 0.305: R1.1 3.81,7.3 5.08,8.57 7.62,8.57 | 7.62,8.57 11.75,8.57 JP1.2 11.75,3.81 12.7,2.86 26.04,2.86 | U1.P$6 7.63,8.58 7.62,8.57
SDA1
  Bottom 0.254: U$4.P$3 66.99,5.71 64.14,2.86
  Bottom 0.305: R22.1 41.91,7.3 43.18,8.57 45.72,8.57 | 45.72,8.57 49.85,8.57 JP5.2 49.85,3.81 50.8,2.86 64.14,2.86 | U2.P$6 45.73,8.58 45.72,8.57
SDA2
  Bottom 0.254: U$6.P$3 28.89,37.47 26.04,34.61
  Bottom 0.305: R43.1 3.81,39.05 5.08,40.32 7.62,40.32 | 7.62,40.32 11.75,40.32 JP9.2 11.75,35.56 12.7,34.61 26.04,34.61 | U3.P$6 7.63,40.33 7.62,40.32
SDA3
  Bottom 0.254: U$8.P$3 66.99,37.47 64.14,34.61
  Bottom 0.305: R64.1 41.91,39.05 43.18,40.32 45.72,40.32 | 45.72,40.32 49.85,40.32 JP13.2 49.85,35.56 50.8,34.61 64.14,34.61 | U4.P$6 45.73,40.33 45.72,40.32
V+  (via drill 0.6)
  Top 0.305: 19.9,13.65 C7.1
  Top 0.406: IC2.4 v18.73,22.23 18.73,26.35 17.78,27.3 17.14,27.3 16.83,27.62 JP2.1 | U$1.P$15 19.9,13.65 | v18.73,15.88 18.73,15.24 20,13.97 C7.1
  Bottom 0.406: v18.73,15.88 v18.73,22.23 IC2.4
V+1  (via drill 0.6)
  Top 0.305: 58,13.65 C24.1
  Top 0.406: IC5.4 v56.83,22.23 56.83,26.35 55.88,27.3 55.24,27.3 54.93,27.62 JP8.1 | U$3.P$15 58,13.65 | v56.83,15.88 56.83,15.24 58.1,13.97 C24.1
  Bottom 0.406: v56.83,15.88 v56.83,22.23 IC5.4
V+2  (via drill 0.6)
  Top 0.305: 19.9,45.4 C42.1
  Top 0.406: IC8.4 v18.73,53.98 18.73,58.1 17.78,59.05 17.14,59.05 16.83,59.37 JP12.1 | U$5.P$15 19.9,45.4 | v18.73,47.62 18.73,46.99 20,45.72 C42.1
  Bottom 0.406: v18.73,47.62 v18.73,53.98 IC8.4
V+3  (via drill 0.6)
  Top 0.305: 58,45.4 C60.1
  Top 0.406: IC11.4 v56.83,53.98 56.83,58.1 55.88,59.05 55.24,59.05 54.93,59.37 JP16.1 | U$7.P$15 58,45.4 | v56.83,47.62 56.83,46.99 58.1,45.72 C60.1
  Bottom 0.406: v56.83,47.62 v56.83,53.98 IC11.4
V-  (via drill 0.6)
  Top 0.406: IC1.11 v20,22.23 20,26.35 20.95,27.3 21.59,27.3 21.91,27.62 JP2.3 | U$1.P$5 v14.29,11.75
  Bottom 0.406: IC1.11 v20,22.23 20,13.34 18.73,12.06 17.46,12.06 | v14.29,11.75 14.5,12.06 17.46,12.06 | C6.2 17.46,12.06
V-1  (via drill 0.6)
  Top 0.406: IC4.11 v58.1,22.23 58.1,26.35 59.05,27.3 59.69,27.3 60.01,27.62 JP8.3 | U$3.P$5 v52.39,11.75
  Bottom 0.406: IC4.11 v58.1,22.23 58.1,13.34 56.83,12.06 55.56,12.06 | v52.39,11.75 52.6,12.06 55.56,12.06 | C25.2 55.56,12.06
V-2  (via drill 0.6)
  Top 0.406: IC7.11 v20,53.98 20,58.1 20.95,59.05 21.59,59.05 21.91,59.37 JP12.3 | U$5.P$5 v14.29,43.5
  Bottom 0.406: IC7.11 v20,53.98 20,45.09 18.73,43.81 17.46,43.81 | v14.29,43.5 14.5,43.81 17.46,43.81 | C43.2 17.46,43.81
V-3  (via drill 0.6)
  Top 0.406: IC10.11 v58.1,53.98 58.1,58.1 59.05,59.05 59.69,59.05 60.01,59.37 JP16.3 | U$7.P$5 v52.39,43.5
  Bottom 0.406: IC10.11 v58.1,53.98 58.1,45.09 56.83,43.81 55.56,43.81 | v52.39,43.5 52.6,43.81 55.56,43.81 | C61.2 55.56,43.81
VREFIN  (via drill 0.6)
  Top 0.305: R21.1 R16.2 27.62,14.07 27.62,14.61 26.35,15.88 21.91,15.88 | 21.91,15.88 20.64,15.88 18.73,17.78 18.73,20.95 IC2.3 14.92,20.95 v14.92,22.23 14.92,23.5 IC2.5 | C14.1 21.91,15.88
  Bottom 0.305: IC2.5 14.92,23.5 v14.92,22.23 14.92,20.95 IC2.3
VREFIN1  (via drill 0.6)
  Top 0.305: R42.1 R41.2 65.72,14.07 65.72,14.61 64.45,15.88 60.01,15.88 | 60.01,15.88 58.74,15.88 56.83,17.78 56.83,20.95 IC5.3 53.02,20.95 v53.02,22.23 53.02,23.5 IC5.5 | C34.1 60.01,15.88
  Bottom 0.305: IC5.5 53.02,23.5 v53.02,22.23 53.02,20.95 IC5.3
VREFIN2  (via drill 0.6)
  Top 0.305: R63.1 R62.2 27.62,45.82 27.62,46.35 26.35,47.62 21.91,47.62 | 21.91,47.62 20.64,47.62 18.73,49.53 18.73,52.7 IC8.3 14.92,52.7 v14.92,53.98 14.92,55.24 IC8.5 | C52.1 21.91,47.62
  Bottom 0.305: IC8.5 14.92,55.24 v14.92,53.98 14.92,52.7 IC8.3
VREFIN3  (via drill 0.6)
  Top 0.305: R84.1 R83.2 65.72,45.82 65.72,46.35 64.45,47.62 60.01,47.62 | 60.01,47.62 58.74,47.62 56.83,49.53 56.83,52.7 IC11.3 53.02,52.7 v53.02,53.98 53.02,55.24 IC11.5 | C70.1 60.01,47.62
  Bottom 0.305: IC11.5 53.02,55.24 v53.02,53.98 53.02,52.7 IC11.3
VREFOUT  (via drill 0.6)
  Top 0.305: 25.82,12.18 R16.1 v24.13,13.97 | R5.2 28.79,24.23 v30.8,22.23 28.79,20.22 R11.2 | C18.1 26.04,11.96 R15.1 26.57,12.06 IC3.1 32.38,12.06 33.02,12.7 33.02,15.88 32.38,16.51 v31.11,16.51
  Top 0.406: R15.1 25.82,12.18
  Bottom 0.305: R7.2 24.34,13.76 v24.13,13.97 | v31.11,16.51 31.11,21.91 v30.8,22.23 28.79,24.23 R5.2
VREFOUT1  (via drill 0.6)
  Top 0.305: 63.92,12.18 R41.1 v62.23,13.97 | R26.2 66.89,24.23 v68.9,22.23 66.89,20.22 R32.2 | C36.1 64.14,11.96 R40.1 64.67,12.06 IC6.1 70.48,12.06 71.12,12.7 71.12,15.88 70.48,16.51 v69.22,16.51
  Top 0.406: R40.1 63.92,12.18
  Bottom 0.305: R28.2 62.45,13.76 v62.23,13.97 | v69.22,16.51 69.22,21.91 v68.9,22.23 66.89,24.23 R26.2
VREFOUT2  (via drill 0.6)
  Top 0.305: 25.82,43.93 R62.1 v24.13,45.72 | R47.2 28.79,55.98 v30.8,53.98 28.79,51.97 R53.2 | C54.1 26.04,43.71 R61.1 26.57,43.81 IC9.1 32.38,43.81 33.02,44.45 33.02,47.62 32.38,48.26 v31.11,48.26
  Top 0.406: R61.1 25.82,43.93
  Bottom 0.305: R49.2 24.34,45.51 v24.13,45.72 | v31.11,48.26 31.11,53.66 v30.8,53.98 28.79,55.98 R47.2
VREFOUT3  (via drill 0.6)
  Top 0.305: 63.92,43.93 R83.1 v62.23,45.72 | R68.2 66.89,55.98 v68.9,53.98 66.89,51.97 R74.2 | C72.1 64.14,43.71 R82.1 64.67,43.81 IC12.1 70.48,43.81 71.12,44.45 71.12,47.62 70.48,48.26 v69.22,48.26
  Top 0.406: R82.1 63.92,43.93
  Bottom 0.305: R70.2 62.45,45.51 v62.23,45.72 | v69.22,48.26 69.22,53.66 v68.9,53.98 66.89,55.98 R68.2

## Text on the board
tPlace: AI0 | V+ | V- | AO0 | AI0 | V+ | V- | AO0 | AI3 | AO3 | AI3 | AO3 | SCL | SDA | +5V | GND | SCL | SDA | +5V | GND | V+ | V- | V+ | V- | AI0 | AO0 | AI0 | AO0 | AI3 | AO3 | AI3 | AO3 | SCL | SDA | +5V | GND | SCL | SDA | +5V | GND